# Altium PCB ethernet-con.PcbDoc
Units mm, origin at the board's own origin, x right, y up, seen from the top; angles counter-clockwise.
Board outline 30.48 x 19.3 mm, 2 copper layers (Top Layer, Bottom Layer); 7 components, 7 nets, 26 pads, 2 vias.
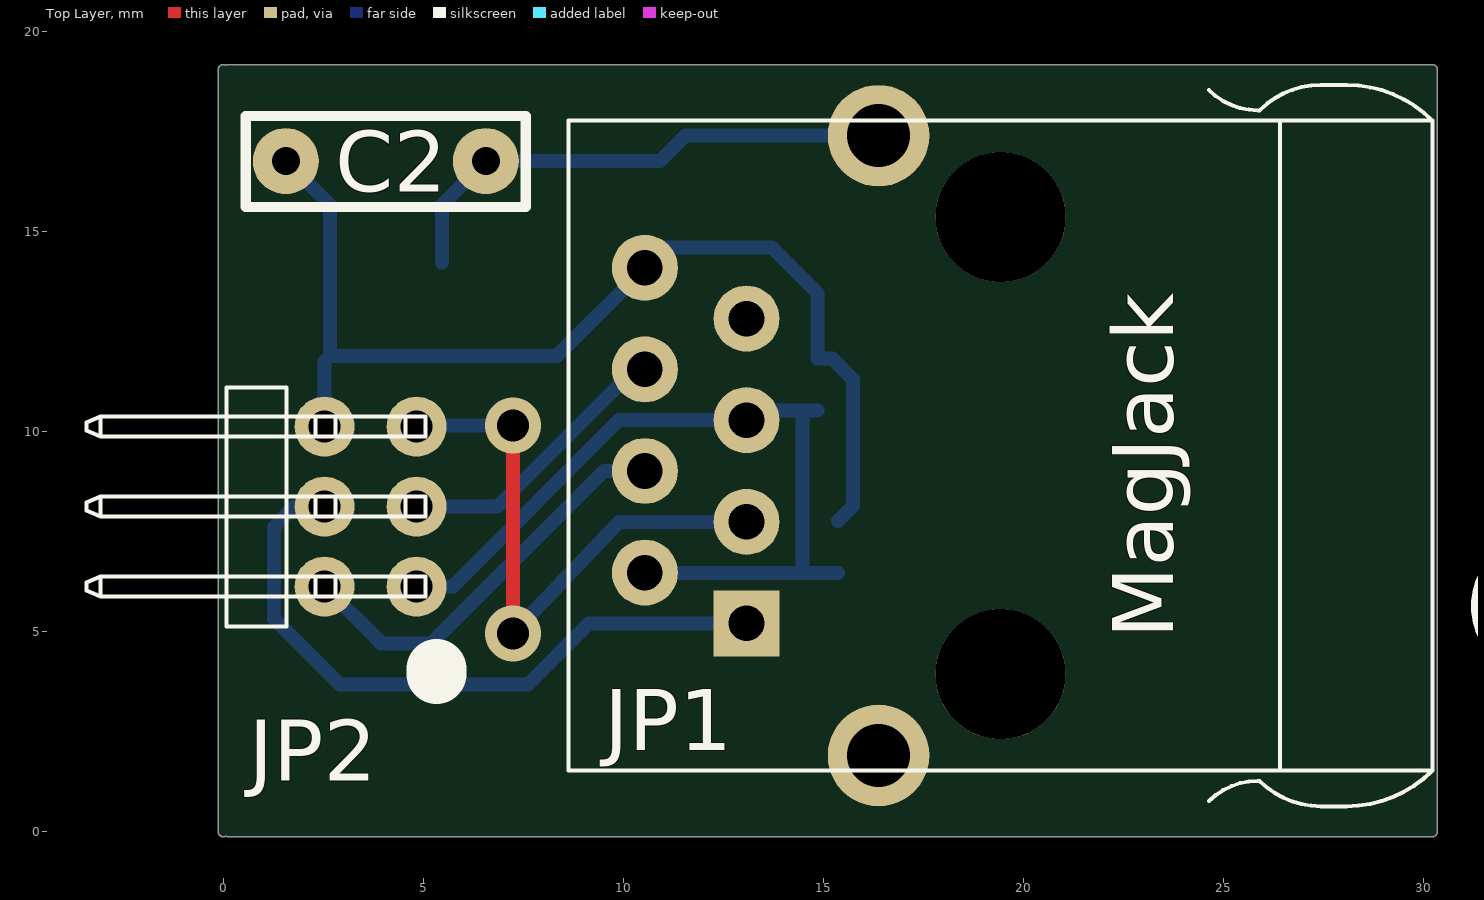
[diagram p0: Top Layer view]
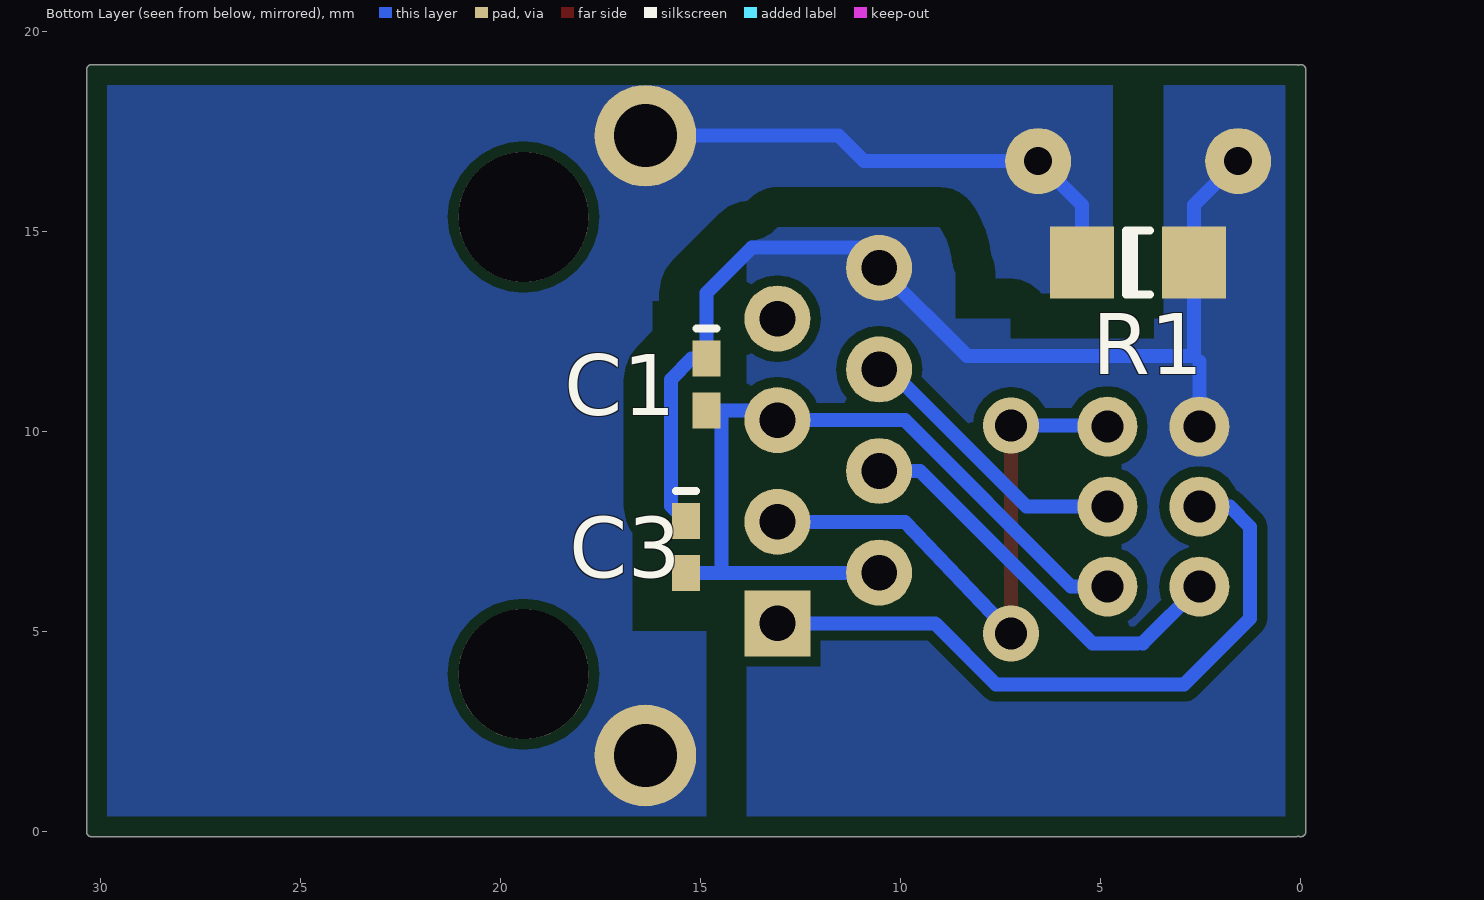
[diagram p1: Bottom Layer view, seen from below]

## Layer stack, top to bottom
Top Layer: signal copper 0.0356
Dielectric: dielectric 0.32, FR-4, Dk 4.8
Bottom Layer: signal copper 0.0356

## Board outline
-0.127,0 ccw(c0,0) 0.064,-0.11 ccw(c0.127,0) 0.127,-0.127 30.226,-0.127 ccw(c30.226,0) 30.353,0 30.353,19.05 ccw(c30.226,19.05) 30.226,19.177 0.127,19.177 ccw(c0.127,19.05) 0.064,19.16 ccw(c0,19.05) -0.127,19.05

## Design rules (kind name [scope] priority, off if disabled: settings)
Clearance Clearance_1 [InNet('EARTH') vs OnLayer('Bottom Layer')] p1: gap=1
Clearance [All] p2: gap=0.254
ComponentClearance ComponentClearance_1 [OnLayer('Bottom Layer') vs OnLayer('Bottom Layer')] p1: gap=0.254 collisioncheckmode=3 verticalgap=0.254
ComponentClearance [OnLayer('Top Layer') vs OnLayer('Top Layer')] p2: gap=0.254 collisioncheckmode=3 verticalgap=0.254
PolygonConnect [All] p1: connectstyle=Direct reliefconductorwidth=0.254 reliefentries=4 polygonreliefangle="90 Angle"
RoomDefinition ethernet-connector [InComponentClass('ethernet-connector')] p1: confinementstyle=ConfineIn formatcopy=TRUE lockcomponents=FALSE outline -3.81,0.254 35.179,0.254 35.179,19.05 -3.81,19.05
RoutingVias [All] p1: holewidth=0.8 width=1.27 viastyle="Through Hole" minholewidth=0.5 minwidth=1 maxholewidth=2 maxwidth=10
SolderMaskExpansion [All] p1: expansion=0.102
TestPointUsage [All] p1: valid=0 allowmultiple=FALSE
Testpoint [All] p1: side=15 testpointundercomponent=TRUE minsize=1.016 maxsize=2.54 preferedsize=1.524 minholesize=0 maxholesize=1.016 preferedholesize=0.813 testpointgrid=0.025 style=1023 order=0-112345678
Width [All] p1: maxlimit=10 minlimit=0.254 preferedwidth=0.5 bottomlayer_prefwidth=0.35 minimp=50.000000 maximp=50.000000 favimp=50.000000
18 further rules are at their usual default settings.

## Components (designator, comment, footprint, x,y, rotation, side; value= is the part's Value field where it differs from the comment)
1 "CC License" CC-License 33.02,5.588 r90 top
C1 "Cap" 0402 14.859,11.176 r270 bottom
C2 "C" c-r5 4.064,16.764 r180 top
C3 "Cap" 0402 15.367,7.112 r270 bottom
JP1 "SI-10021" SI-10021 14.986,9.652 r90 top
JP2 "M22-2540305" M22-2540305 3.683,8.128 r90 top
R1 "Res2" CC3216-1206 4.064,14.224 r180 bottom

## Footprints (in the part's own frame and the unit in brackets; to place one, negate y for a bottom-side part, rotate by r counter-clockwise, add the part's x,y. Pads: shape width x height; smd on the part's side, far side on the other; paste and mask are expansions set on the pad)
0402 [mm] "Chip Capacitor; Body 1.0 x 0.5 mm (LxW typ)"
  rect 0.9x0.7 smd: 1(-0.65,0) 2(0.65,0)
  silkscreen extent -1.4,-0.25 -1.4,0.25
c-r5 [mm] "Condensator spacing 5mm"
  round 1.651 hole 0.7: 1(-2.5,0) 2(2.5,0)
  silkscreen extent -3.5,-1.13 3.5,1.15
CC3216-1206 [mm] "Chip Capacitor; Body 3.2 x 1.6 mm (LxW typ)"
  rect 1.6x1.8 smd: 1(-1.4,0) 2(1.4,0)
  silkscreen extent -0.3,-0.8 0.3,0.8
CC-License [mm]
  silkscreen extent -1.65,-1.73 1.75,1.67
M22-2540305 [mm] "Harwin 2mm horizontal connector 2x3 pin"
  round 1.5 hole 0.8: 1(-2,-1.15) 2(-2,1.15) 3(0,-1.15) 4(0,1.15) 5(2,-1.15) 6(2,1.15)
  silkscreen extent -3,-1.38 2.98,7.1
SI-10021 [mil] "MagJack from Bel Stewart, single port RJ45 with magnetics, without LED's"
  round 128 hole 128: 0(-225,-175) 0(225,-175)
  rect 65x65 hole 35: 1(-175,75)
  round 65 hole 35: 2(-125,175) 3(-75,75) 4(-25,175) 5(25,75) 6(75,175) 7(125,75) 8(175,175)
  round 100 hole 62: s(-305,-55) s(305,-55)
  silkscreen extent -355,-600 355,250

## Part data
C1 C3: "Capacitor"
JP1: "MagJack from Bel Stewart, single port RJ45 with magnetics, without LED's"
R1: "Resistor"

## Via types
v1: diameter 1.4, hole 0.8, Top Layer to Bottom Layer, 2 vias

## Nets (pads, with @x,y where several pads share a name; then routed paths per layer and width w, separated by ;. In a path a pad name is that pad's centre, name@x,y a point inside that pad or via, vN(x,y) a via of type N, cw(c..) or ccw(c..) an arc to the next point about the centre after c; other vN are vias at no path point)
3.3V: C1.2 C3.2 JP1.2 JP1.5 JP2.1 | length 21.1
  Bottom Layer w0.35: JP2.1 5.74,6.128 9.899,10.287 JP1.5 13.32,10.526 C1.2 14.478,10.526 14.478,6.462 ; JP1.2 10.556,6.462 C3.2
EARTH: C2.1 JP1.s R1.1 | length 13.1
  Bottom Layer w0.35: R1.1 5.464,15.664 C2.1 10.922,16.764 11.557,17.399 JP1.s@16.383,17.399
GND: C1.1 C2.2 C3.1 JP1.8 JP2.6 R1.2 | length 27.2
  Bottom Layer w0.35: C2.2 2.664,15.664 2.664,11.896 ; JP2.6 2.533,11.759 ; 2.667,11.893 8.337,11.893 JP1.8 11.049,14.605 13.716,14.605 14.859,13.462 C1.1 15.225,11.826 15.748,11.303 15.748,8.143 C3.1
RD+: JP1.1 JP2.4 | length 16.9
  Bottom Layer w0.35: JP2.4 1.771,8.128 1.263,7.62 1.263,5.334 2.914,3.683 ; 2.921,3.683 7.613,3.683 9.137,5.207 JP1.1
RD-: JP1.3 JP2.5 | length 14.7
  Top Layer w0.35: v1(7.239,4.953) v1(7.239,10.16)
  Bottom Layer w0.35: JP2.5 4.865,10.16 v1(7.239,10.16) ; v1(7.239,4.953) 9.899,7.747 JP1.3
TD+: JP1.4 JP2.2 | length 10.3
  Bottom Layer w0.35: JP2.2 3.937,4.724 3.937,4.699 ; 4.082,4.699 5.2,4.699 9.518,9.017 JP1.4
TD-: JP1.6 JP2.3 | length 7.1
  Bottom Layer w0.35: JP2.3 6.851,8.128 10.28,11.557 JP1.6
pads on no net: JP1.0 JP1.7

## Polygon pours and split planes (outlines as drawn)
EARTH on Bottom Layer "Bottom Layer-EARTH" (solid, remove dead copper, pour order 1001): 4.699,19.05 4.699,13.462 15.621,13.462 15.621,5.842 14.859,5.842 14.859,0 30.226,0 30.226,19.05
GND on Bottom Layer "Bottom Layer-GND" (solid, remove dead copper, pour order 1000): 0,19.05 3.429,19.05 3.429,12.827 8.636,12.827 8.636,15.113 13.843,15.113 13.843,0 0,0

## Silkscreen, mask and mechanical layers (free items; w line width, h text height)
Top Overlay:
  lines w1.5: 5.334,3.937 5.334,4.064
Mechanical 1:
  lines w0.254: 0,0 0,19.05 ; 0.127,0 30.226,0 30.226,19.05 0.127,19.05

## Text inside footprints (layer, text, board x,y; h text height)
1: Top Overlay "Licensed" at 32.645,8.013 h1 r90; Top Overlay "BY-NC-SA" at 34.47,8.038 h1 r90; Top Overlay "CC" at 33.695,4.538 h1.3 r90
JP1: Top Overlay "MagJack" at 23.749,4.826 h1.52 r90